# Altium PCB 数粒机转接板.PcbDoc
Units mm, origin at the board's own origin, x right, y up, seen from the top; angles counter-clockwise.
Board outline 152 x 52 mm, 2 copper layers (Top Layer, Bottom Layer); 6 components, 31 nets, 136 pads, 0 vias.
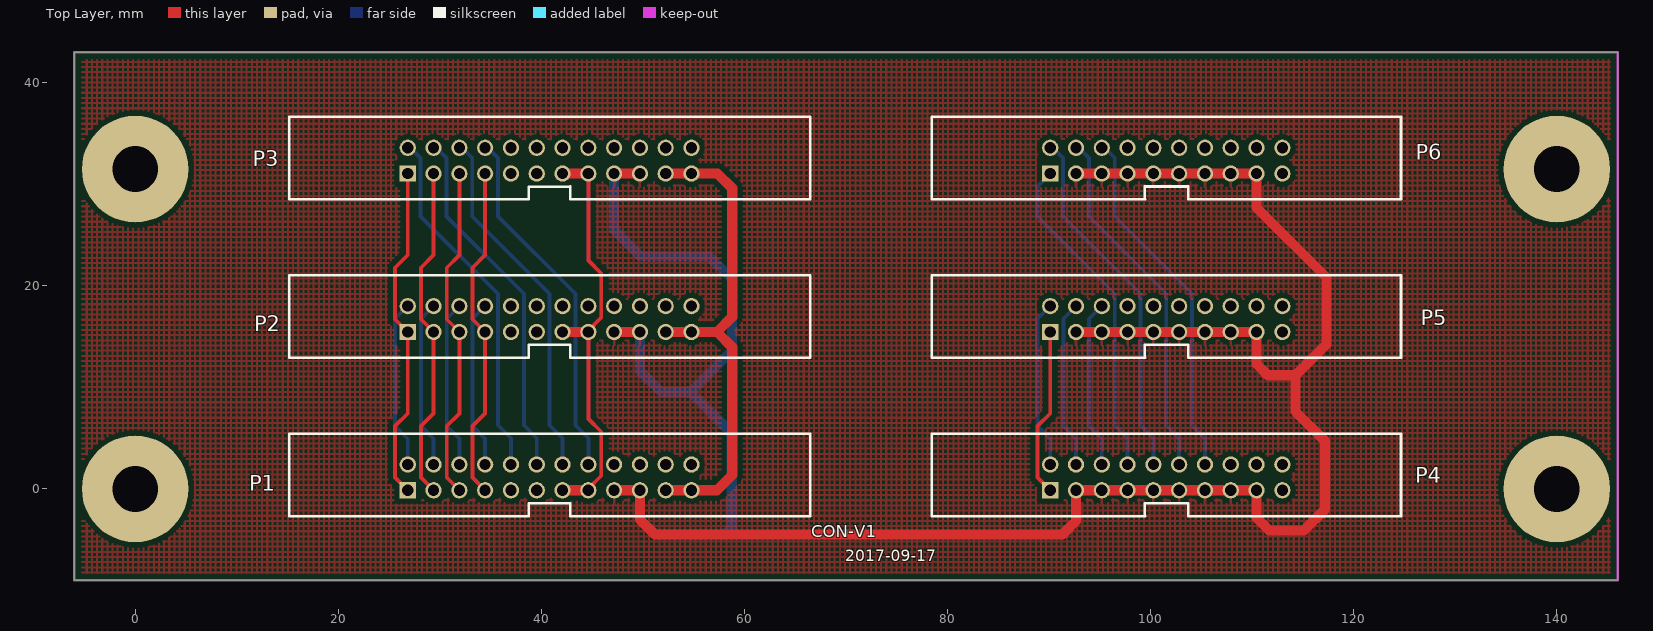
[diagram p0: Top Layer view]
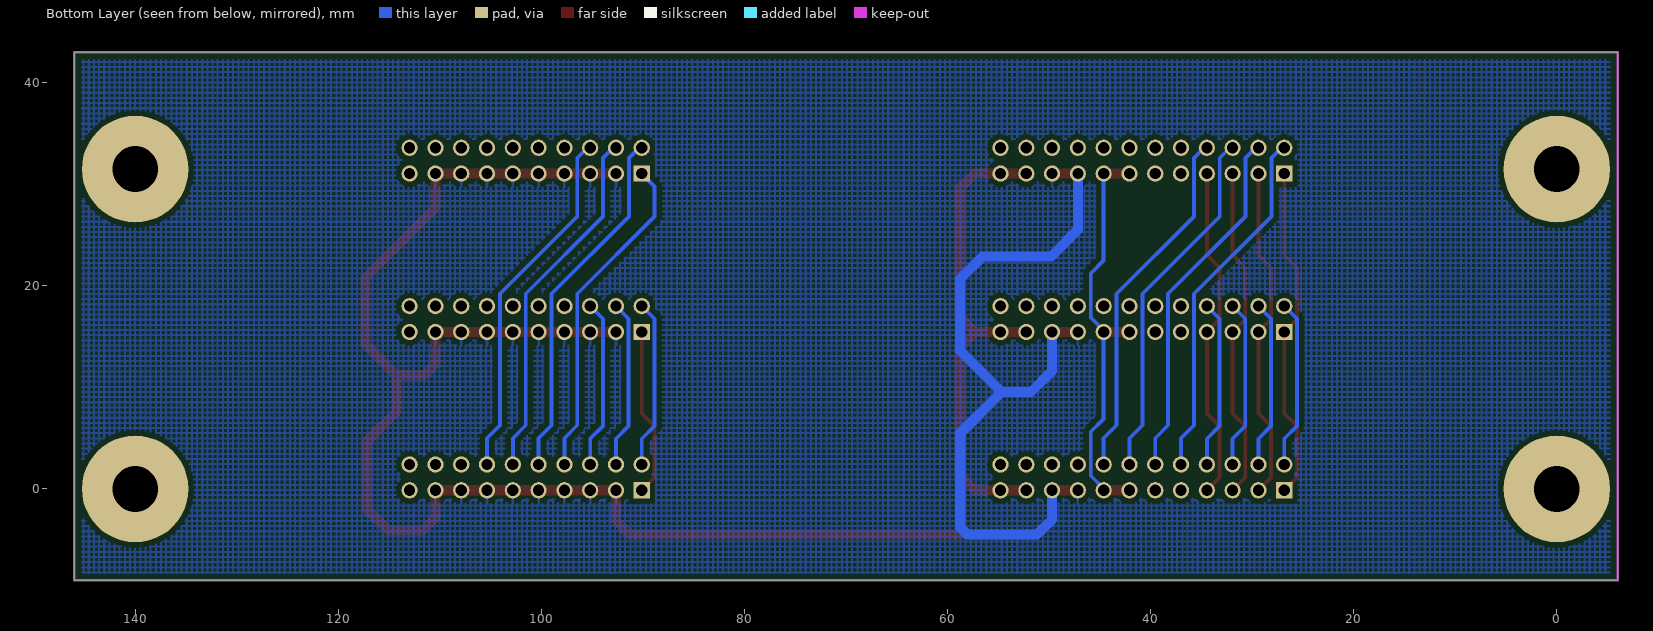
[diagram p1: Bottom Layer view, seen from below]

## Layer stack, top to bottom
Top Layer: signal copper 0.0356
Dielectric: dielectric 0.32, FR-4, Dk 4.8
Bottom Layer: signal copper 0.0356

## Board outline
-6,-9 146,-9 146,43 -6,43

## Design rules (kind name [scope] priority, off if disabled: settings)
Clearance Clearance_1 [InPolygon] p1: gap=0.508
Clearance [All] p2: gap=0.2
FabricationTestPointUsage TestPointUsage [All] p1: valid=0 allowmultiple=FALSE
FabricationTestpoint Testpoint [(IsPad And (OnTopLayer Or OnBottomLayer))] p1: side=3 testpointundercomponent=TRUE minsize=1.016 maxsize=2.54 preferedsize=1.524 minholesize=0 maxholesize=1.016 preferedholesize=0.813 testpointgrid=0.025 allowsidetop=TRUE allowsidebottom=TRUE usegrid=TRUE gridtolerance=0
HoleSize [All] p1 off: absolutevalues=TRUE maxlimit=2.54 minlimit=0.025 maxpercent=80.000 minpercent=20.000
MinimumSolderMaskSliver [All] p1 off: minsoldermaskwidth=0.2
PolygonConnect [All] p1: connectstyle=Relief reliefconductorwidth=0.254 reliefentries=4 polygonreliefangle="90 Angle"
RoutingVias [All] p1: holewidth=0.254 width=0.6 viastyle="Through Hole" minholewidth=0.254 minwidth=0.6 maxholewidth=0.254 maxwidth=0.6
SilkToSilkClearance [All] p1: silktosilkclearance=-10
SilkscreenOverComponentPads [All] p1: minsilkscreentomaskgap=0
SolderMaskExpansion [All] p1: expansion=0.102
Width [All] p1: maxlimit=2 minlimit=0.254 preferedwidth=0.254
22 further rules are at their usual default settings.

## Components (designator, comment, footprint, x,y, rotation, side; value= is the part's Value field where it differs from the comment)
P1 "牛角插座" niujiaocha24p 26.842,-0.135 r0 top
P2 "牛角插座" niujiaocha24p 26.842,15.46 r0 top
P3 "牛角插座" niujiaocha24p 26.842,31.056 r0 top
P4 "Header 10X2" niujiaocha20p 90.114,-0.135 r0 top
P5 "Header 10X2" niujiaocha20p 90.114,15.46 r0 top
P6 "Header 10X2" niujiaocha20p 90.114,31.056 r0 top

## Footprints (in the part's own frame and the unit in brackets; to place one, negate y for a bottom-side part, rotate by r counter-clockwise, add the part's x,y. Pads: shape width x height; smd on the part's side, far side on the other; paste and mask are expansions set on the pad)
niujiaocha20p [mm]
  rect 1.6x1.6 hole 1.1: 1(0,0)
  round 1.6 hole 1.1: 2(0,2.54) 3(2.54,0) 4(2.54,2.54) 5(5.08,0) 6(5.08,2.54) 7(7.62,0) 8(7.62,2.54) 9(10.16,0) 10(10.16,2.54) 11(12.7,0) 12(12.7,2.54) 13(15.24,0) 14(15.24,2.54) 15(17.78,0) 16(17.78,2.54) 17(20.32,0) 18(20.32,2.54) 19(22.86,0) 20(22.86,2.54)
  silkscreen extent -11.68,-2.54 34.54,5.59
niujiaocha24p [mm] "Connector; Header;"
  rect 1.6x1.6 hole 1.1: 1(0,0)
  round 1.6 hole 1.1: 2(0,2.54) 3(2.54,0) 4(2.54,2.54) 5(5.08,0) 6(5.08,2.54) 7(7.62,0) 8(7.62,2.54) 9(10.16,0) 10(10.16,2.54) 11(12.7,0) 12(12.7,2.54) 13(15.24,0) 14(15.24,2.54) 15(17.78,0) 16(17.78,2.54) 17(20.32,0) 18(20.32,2.54) 19(22.86,0) 20(22.86,2.54) 21(25.4,0) 22(25.4,2.54) 23(27.94,0) 24(27.94,2.54)
  silkscreen extent -11.68,-2.54 39.62,5.59

## Part data
P1 P2 P3: library part "Header 12X2", "Header, 12-Pin, Dual row"
P4 P5 P6: "Header, 10-Pin, Dua"

## Free pads (board coordinates)
  round 10.5 hole 4.5 unplated: 1(0,31.5) 2(0,0) 3(140,0) 4(140,31.5)

## Nets (pads, with @x,y where several pads share a name; then routed paths per layer and width w, separated by ;. In a path a pad name is that pad's centre, name@x,y a point inside that pad or via, vN(x,y) a via of type N, cw(c..) or ccw(c..) an arc to the next point about the centre after c; other vN are vias at no path point)
A0: P1.1 P2.1 P3.1 | length 33.3
  Top Layer w0.381: P1.1 25.598,1.109 25.598,6.189 26.842,7.434 P2.1 25.598,16.705 25.598,21.785 26.842,23.029 P3.1
A1: P1.3 P2.3 P3.3 | length 33.3
  Top Layer w0.381: P1.3 28.138,1.109 28.138,6.189 29.382,7.434 P2.3 28.138,16.705 28.138,21.785 29.382,23.029 P3.3
A2: P1.5 P2.5 P3.5 | length 33.3
  Top Layer w0.381: P1.5 30.678,1.109 30.678,6.189 31.922,7.434 P2.5 30.678,16.705 30.678,21.785 31.922,23.029 P3.5
CH1: P1.2 P2.2 | length 16.6
  Bottom Layer w0.381: P1.2 26.842,4.945 25.598,6.189 25.598,16.756 P2.2
CH2: P1.4 P2.4 | length 16.6
  Bottom Layer w0.381: P1.4 29.382,4.945 28.138,6.189 28.138,16.756 P2.4
CH3: P1.6 P2.6 | length 16.6
  Bottom Layer w0.381: P1.6 31.922,4.945 30.678,6.189 30.678,16.756 P2.6
CH4: P1.8 P2.8 | length 16.6
  Bottom Layer w0.381: P1.8 34.462,4.945 33.218,6.189 33.218,16.756 P2.8
CH5: P1.10 P3.2 | length 35.6
  Bottom Layer w0.381: P3.2 27.122,33.596 28.112,32.605 28.112,26.839 35.732,19.219 35.732,6.265 37.002,4.995 P1.10
CH6: P1.12 P3.4 | length 35.3
  Bottom Layer w0.381: P3.4@29.662,33.596 30.652,32.605 30.652,26.839 38.272,19.219 38.272,6.265 39.542,4.995 P1.12
CH7: P1.14 P3.6 | length 35.3
  Bottom Layer w0.381: P3.6@32.202,33.596 33.192,32.605 33.192,26.839 40.812,19.219 40.812,6.265 42.082,4.995 P1.14
CH8: P1.16 P3.8 | length 35.3
  Bottom Layer w0.381: P3.8@34.742,33.596 35.732,32.605 35.732,26.839 43.352,19.219 43.352,6.265 44.622,4.995 P1.16
CH9: P1.18
CH10: P1.20
CH11: P1.22
CH12: P1.24
EN: P1.7 P2.7 P3.7 | length 33.3
  Top Layer w0.381: P1.7 33.218,1.109 33.218,6.189 34.462,7.434 P2.7 33.218,16.705 33.218,21.785 34.462,23.029 P3.7
GND: P1.17 P1.19 P2.17 P2.19 P3.17 P3.19 P4.3 P4.5 P4.7 P4.9 P4.11 P4.13 P4.15 P4.17 P5.3 P5.5 P5.7 P5.9 P5.11 P5.13 P5.15 P5.17 P6.3 P6.5 P6.7 P6.9 P6.11 P6.13 P6.15 P6.17 | length 237.3
  Top Layer w1: P1.17 P1.19 49.702,-3.006 51.175,-4.479 91.333,-4.479 92.654,-3.158 P4.3 ; P2.17 P2.19 ; P3.17 P3.19 ; P4.3@92.457,-0.135 P4.3 ; P5.3 P5.5 P5.7 P5.9 P5.11 P5.13 P5.15 P5.17 110.434,12.311 111.551,11.193 114.269,11.193 ; P6.3 P6.5 P6.7 P6.9 P6.11 P6.13 P6.15 P6.17 110.434,27.703 117.317,20.82 117.317,14.241 114.269,11.193 ; P4.3 P4.5 P4.7 P4.9 P4.11 P4.13 P4.15 P4.17 110.434,-2.853 111.678,-4.098 115.082,-4.098 117.19,-1.99 117.19,4.691 114.269,7.612 114.269,11.193
  Bottom Layer w1: P3.17 47.162,25.519 49.804,22.877 56.56,22.877 58.77,20.667 58.77,13.631 54.681,9.542 ; P1.19 49.702,-3.006 51.175,-4.479 58.059,-4.479 58.745,-3.793 58.745,5.478 54.681,9.542 ; P2.19 49.702,11.625 51.785,9.542 54.681,9.542
VCC3.3: P1.21 P1.23 P2.21 P2.23 P3.21 P3.23 | length 48.9
  Top Layer w1: P1.21 P1.23 57.297,-0.135 58.795,1.363 58.795,13.962 57.297,15.46 ; P2.21 P2.23 57.297,15.46 ; P3.21 P3.23 57.348,31.056 58.795,29.608 58.795,16.959 57.297,15.46
VCC5V: P1.13 P1.15 P2.13 P2.15 P3.13 P3.15 | length 73.7
  Top Layer w0.381: P1.15@44.622,0.024 45.892,1.294 45.892,5.63 44.622,6.9 P2.15 ; P2.15@44.622,15.619 45.892,16.889 45.892,21.226 44.622,22.496 P3.15
  Top Layer w1: P1.13 P1.15 ; P2.13 P2.15 ; P3.13 P3.15
  Bottom Layer w0.381: P1.15@44.622,0.024 45.892,1.294 45.892,5.63 44.622,6.9 P2.15 44.622,15.619 45.892,16.889 45.892,21.226 44.622,22.496 P3.15
VOUT1: P4.1 P5.1 | length 16.6
  Top Layer w0.381: P4.1 88.869,1.109 88.869,6.189 90.114,7.434 P5.1
VOUT2: P4.2 P5.2 | length 16.6
  Bottom Layer w0.381: P4.2 90.114,4.945 88.869,6.189 88.869,16.756 P5.2
VOUT3: P4.4 P5.4 | length 16.6
  Bottom Layer w0.381: P4.4 92.654,4.945 91.409,6.189 91.409,16.756 P5.4
VOUT4: P4.6 P5.6 | length 16.6
  Bottom Layer w0.381: P4.6 95.194,4.945 93.949,6.189 93.949,16.756 P5.6
VOUT5: P4.8 P6.1 | length 32.9
  Bottom Layer w0.381: P6.1 88.844,29.786 88.844,26.839 96.464,19.219 96.464,6.265 97.734,4.995 P4.8
VOUT6: P4.10 P6.2 | length 35.3
  Bottom Layer w0.381: P6.2@90.393,33.596 91.384,32.605 91.384,26.839 99.004,19.219 99.004,6.265 100.274,4.995 P4.10
VOUT7: P4.12 P6.4 | length 35.3
  Bottom Layer w0.381: P6.4@92.933,33.596 93.924,32.605 93.924,26.839 101.544,19.219 101.544,6.265 102.814,4.995 P4.12
VOUT8: P4.14 P6.6 | length 35.3
  Bottom Layer w0.381: P6.6@95.473,33.596 96.464,32.605 96.464,26.839 104.084,19.219 104.084,6.265 105.354,4.995 P4.14
VOUT9: P4.16
VOUT10: P4.18
VOUT11: P4.20
VOUT12: P4.19
pads on no net: P1.9 P1.11 P2.9 P2.10 P2.11 P2.12 P2.14 P2.16 P2.18 P2.20 P2.22 P2.24 P3.9 P3.10 P3.11 P3.12 P3.14 P3.16 P3.18 P3.20 P3.22 P3.24 P5.8 P5.10 P5.12 P5.14 P5.16 P5.18 P5.19 P5.20 P6.8 P6.10 P6.12 P6.14 P6.16 P6.18 P6.19 P6.20

## Polygon pours and split planes (outlines as drawn)
GND on Top Layer "top" (hatched 90Degree grid 0.508 track 0.203, remove dead copper, pour order 2): -6.085,43 146.162,43 146.162,-9 -6.085,-9
GND on Bottom Layer "bottom" (hatched 90Degree grid 0.508 track 0.203, remove dead copper, pour order 4): -6.111,43 146.239,43 146.239,-9 -6.111,-9

## Keep-outs
Keep-Out Layer:
  the board outline again, w0.254

## Silkscreen, mask and mechanical layers (free items; w line width, h text height)
Top Overlay:
  text "The four Hole Size Diameter=4.5mm" at -65.258,86.377 h2
  text "CON-V1" at 66.593,-4.758 h1.2
  text "2017-09-17" at 69.946,-7.146 h1.1

## Dimensions
-6,43 to 146,43 on Top Overlay
-6,43 to -6,-9 on Top Overlay
0,31.5 to 0,0 on Top Overlay
0,0 to 140,0 on Top Overlay